# EAGLE board SKAARDUINO-POE_v1.0_panel (EAGLE 7.5.0), part 1 of 5
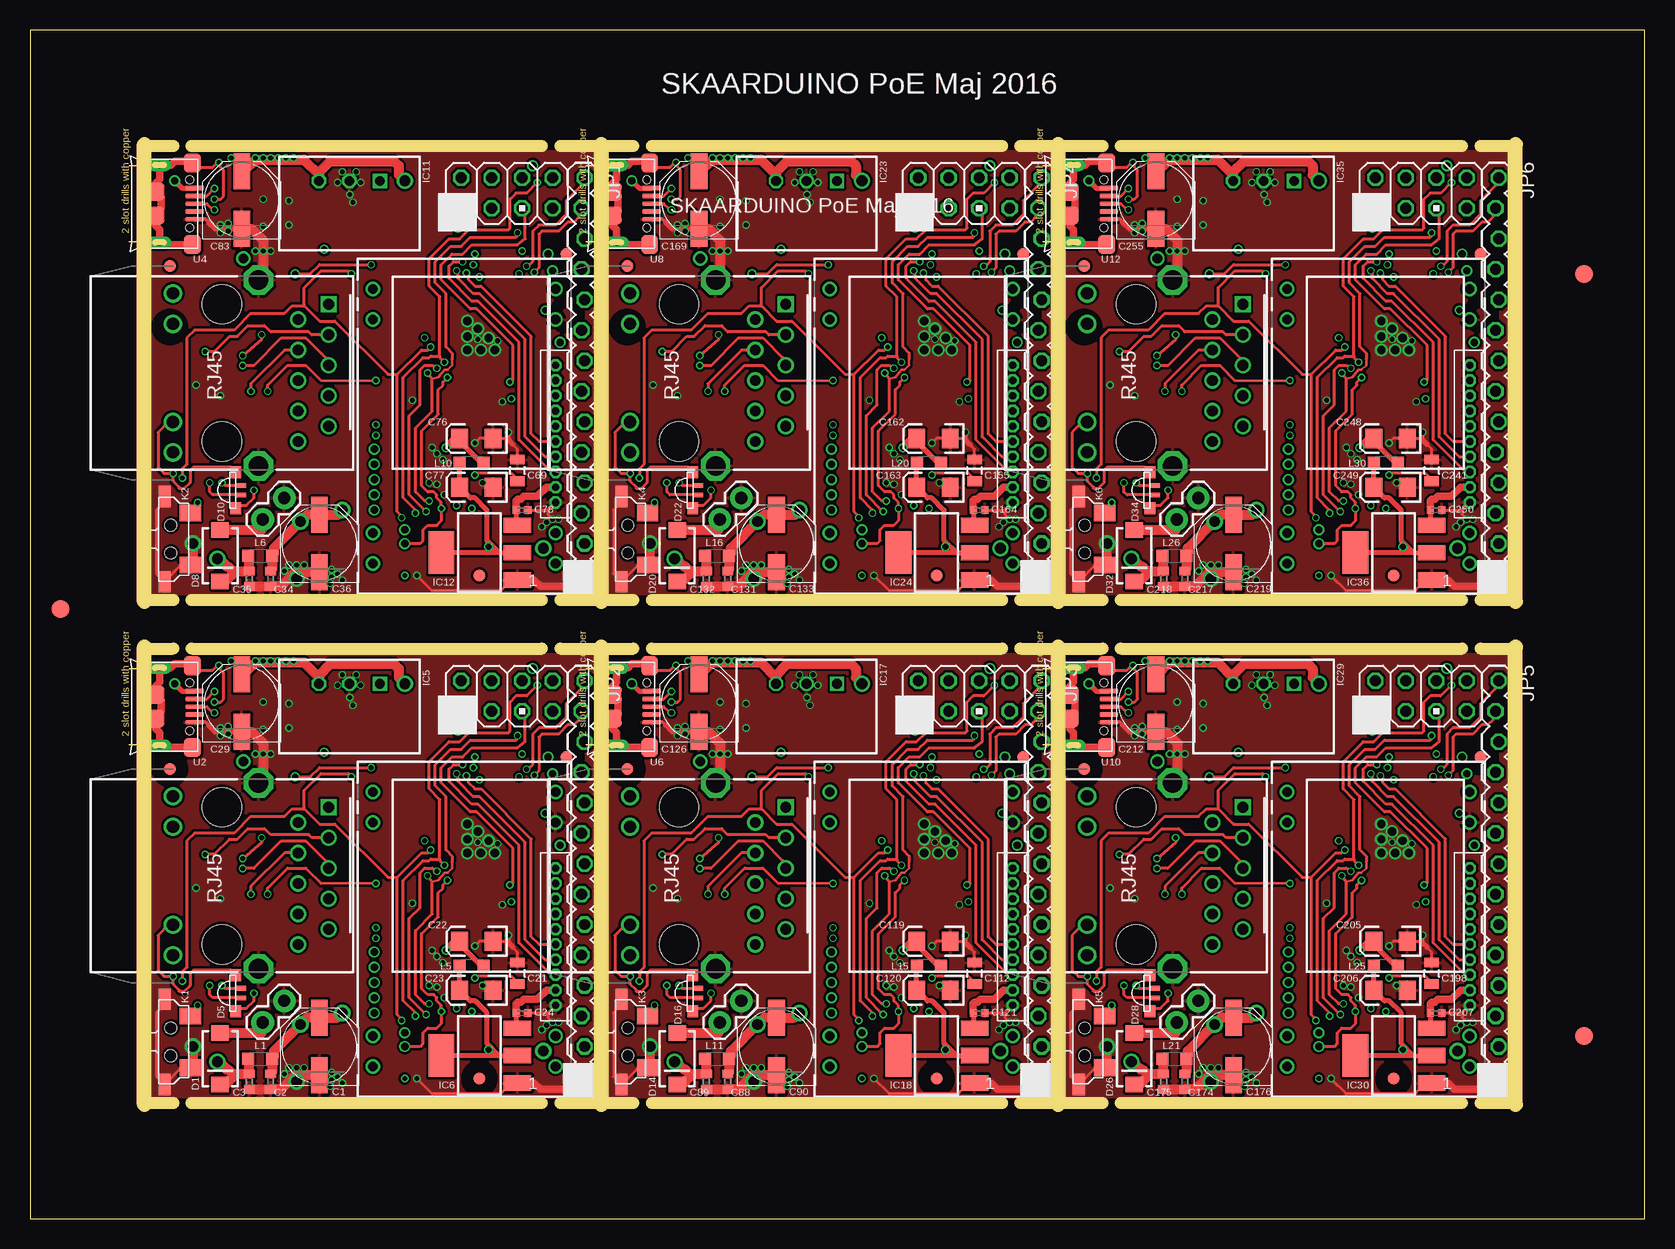
[diagram p0: board, top side]
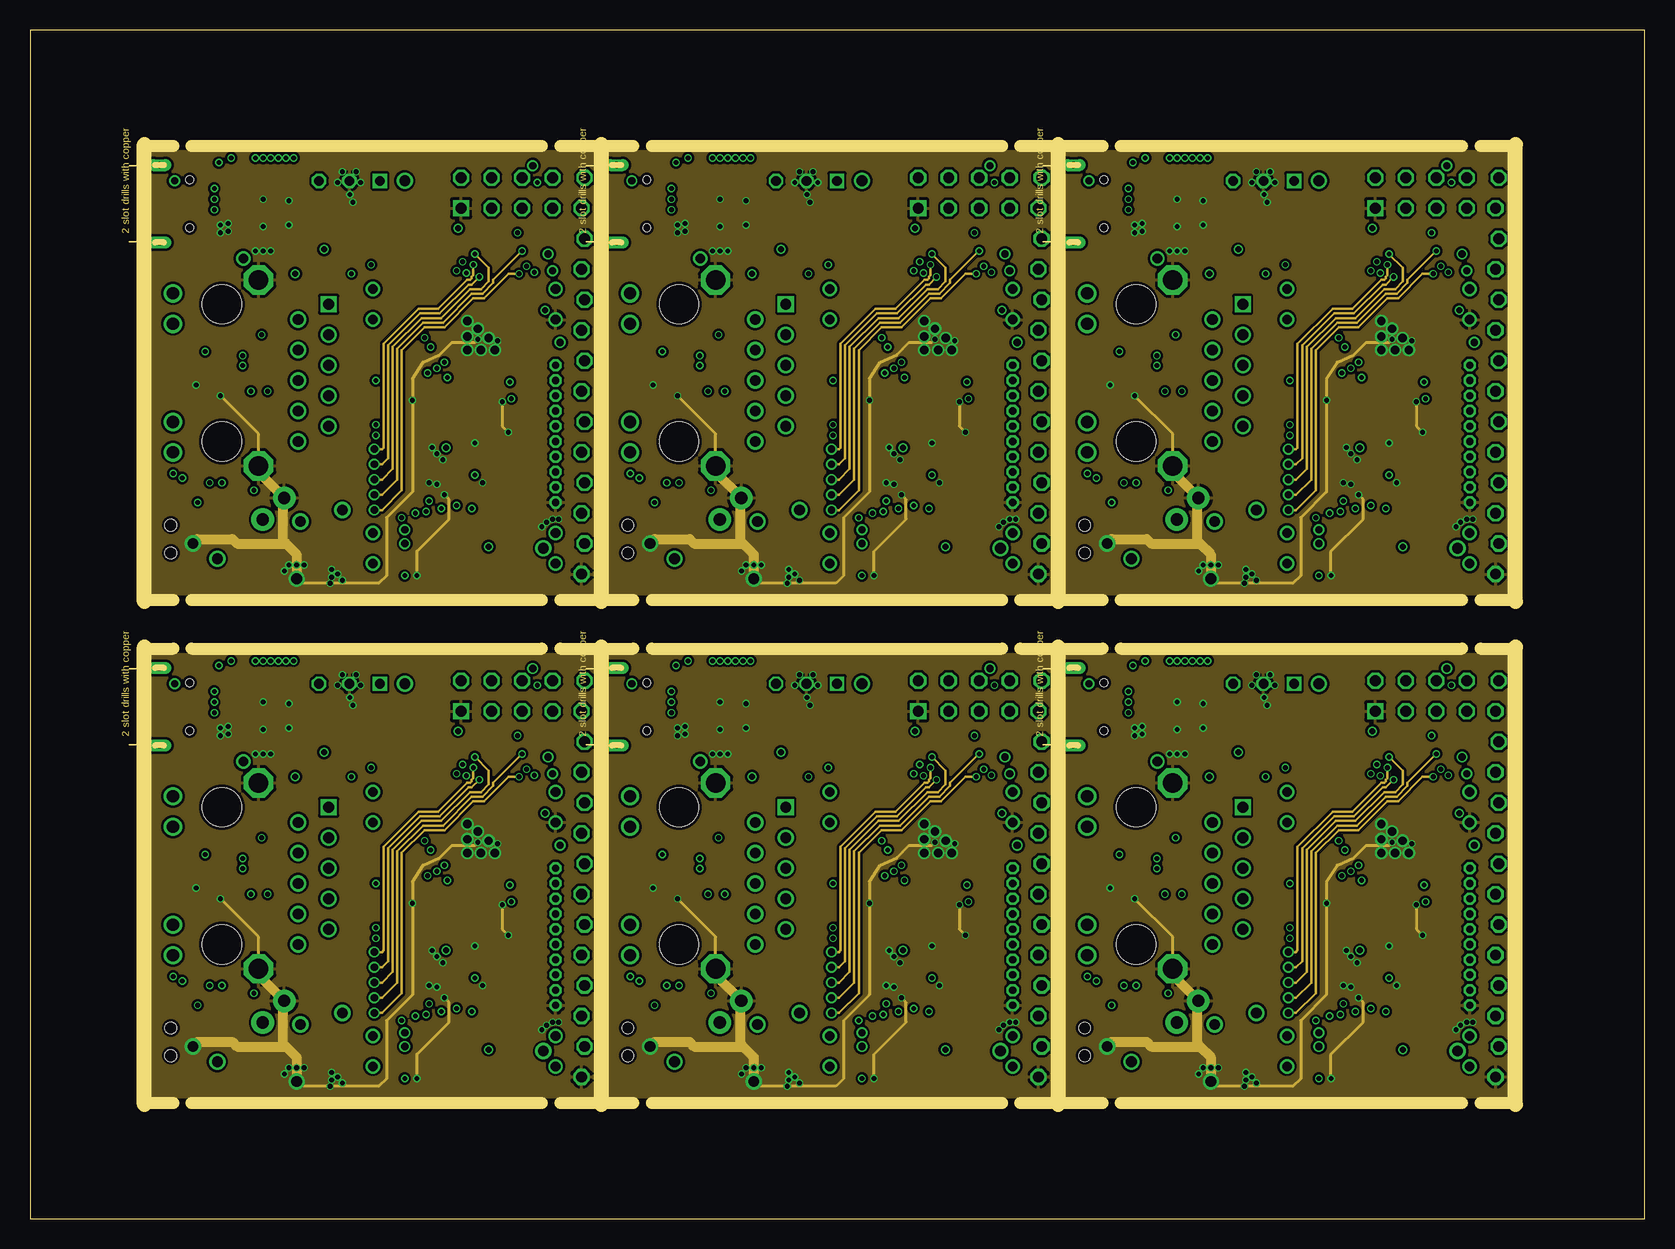
[diagram p1: board, inner layer GND]
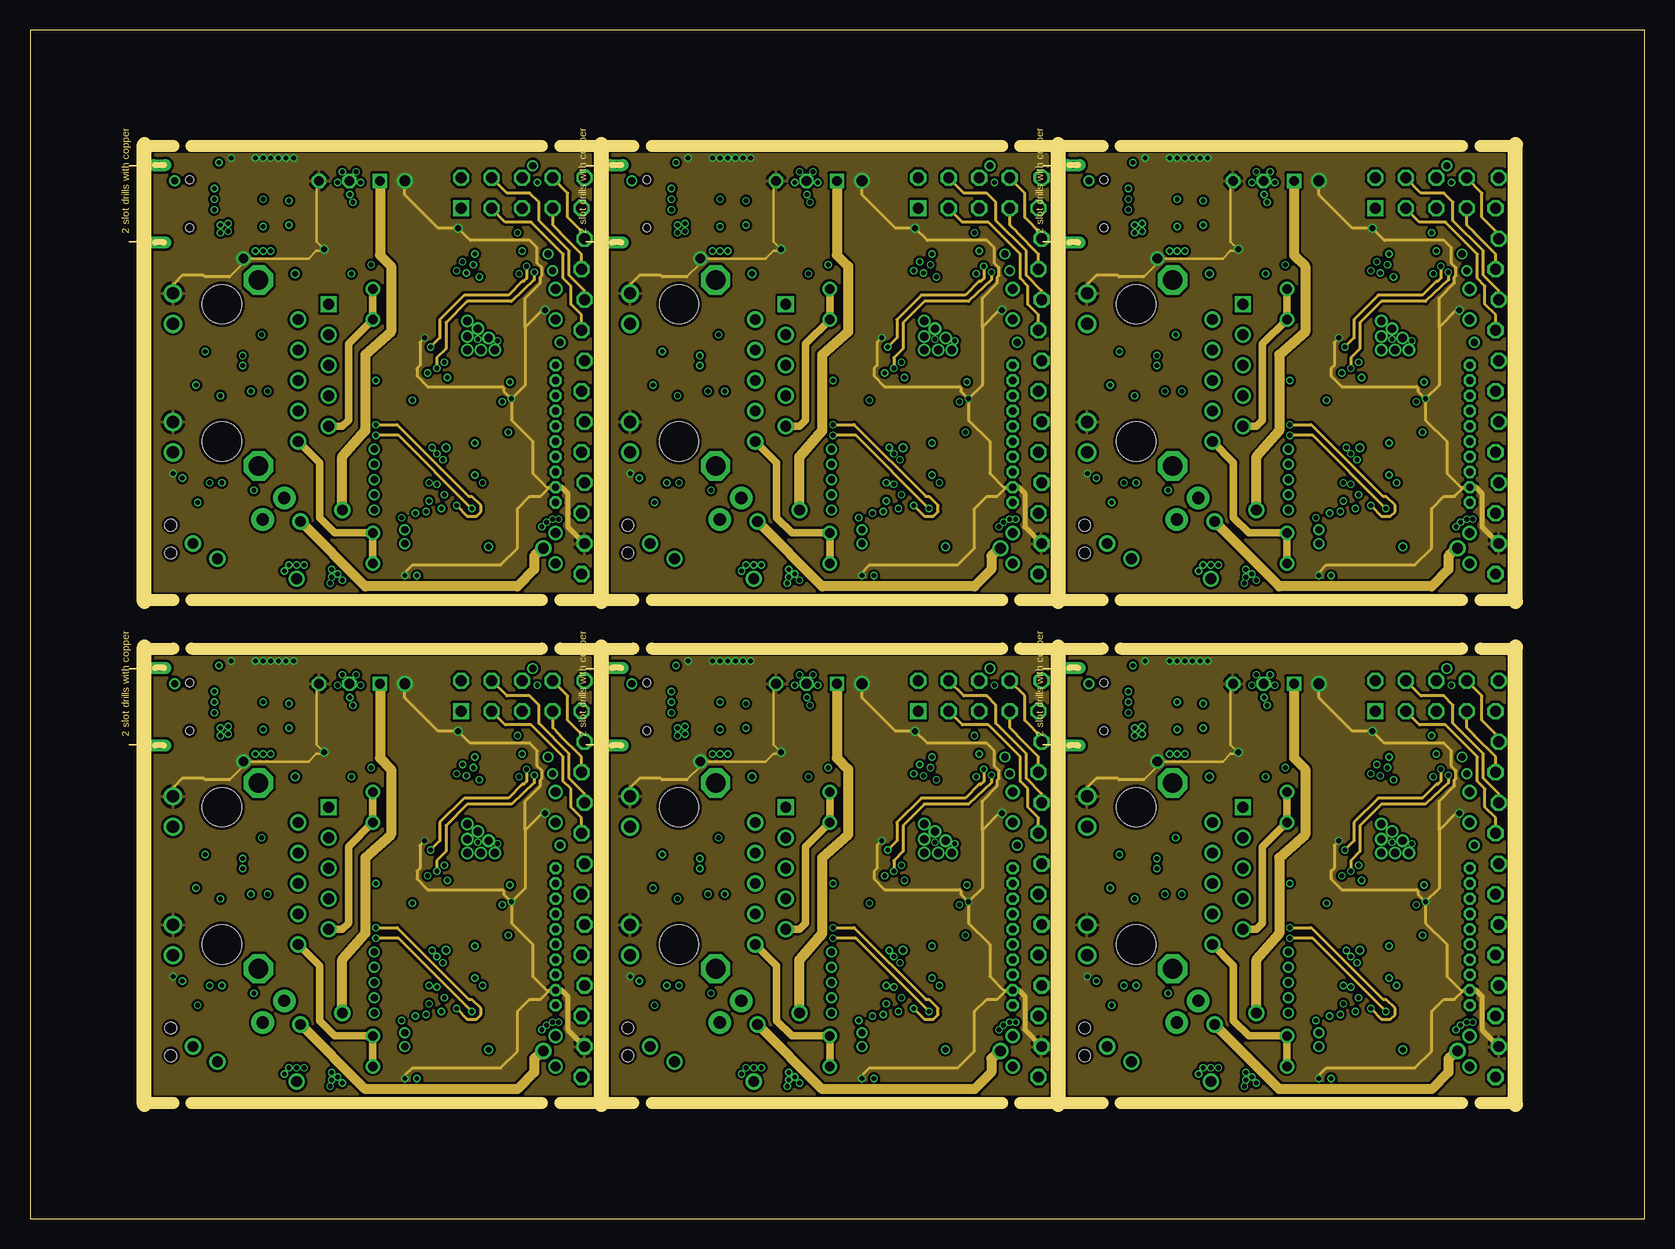
[diagram p2: board, inner layer 5V]
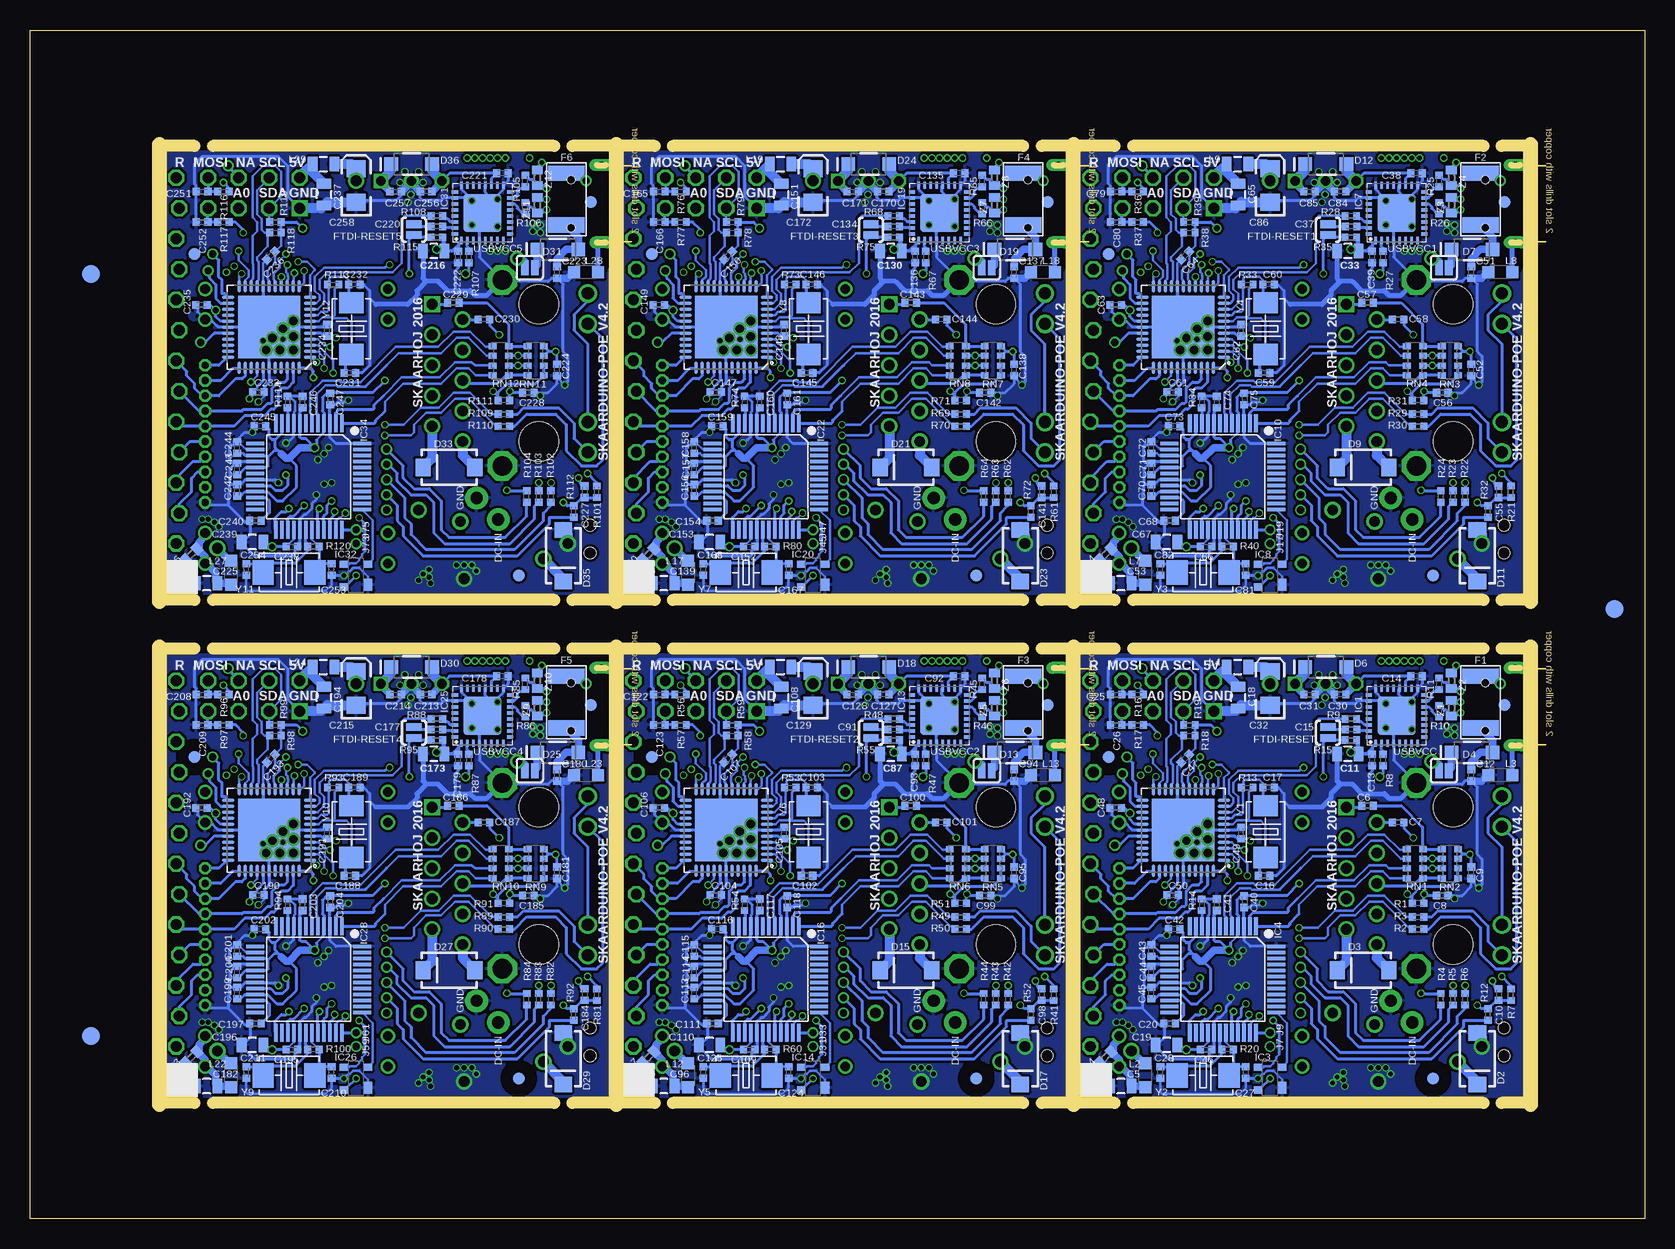
[diagram p3: board, bottom side, seen from below]

Size 134.62 x 99.06 mm. Coordinates in mm from the lower left corner, seen from the top.
Outline: 0,0 134.62,0 134.62,99.06 0,99.06 0,0
Copper layers (1*2*15*16): Top 0.035mm / dielectric 0.2mm / GND 0.0175mm / dielectric 0.3mm / 5V 0.0175mm / dielectric 0.2mm / Bottom 0.035mm
Design rules "SeeedStudio_4layer_DRU_no_angle_20140221 *": minimum track width 8mil, minimum drill 12mil, track to track 8mil, track to pad 8mil, pad to pad 8mil, via to via 8mil, smd to smd 0mil, copper to edge 10mil, drill to drill 8mil, minimum pad ring 6mil, minimum via ring 4mil, stop-mask expansion 4mil, vias tented up to drill 100mil, thermal gap 10mil
Net classes: 0 default: width 0.203 mm, clearance 0.127 mm; 1 power: width 0.203 mm, clearance 0.127 mm; 2 VIN: width 0.406 mm, clearance 0.61 mm
tKeepout: area 29.8,10.2 to 33.1,47
tRestrict: area 10.7,36.4 to 12.7,38.5; area 43.7,37.5 to 45.7,39.5; area 36.4,10.7 to 38.5,12.7; area 10.7,73.3 to 12.7,75.3; area 43.7,74.3 to 45.7,76.3; area 36.4,47.5 to 38.5,49.5; area 48.8,36.4 to 50.8,38.5; area 81.8,37.5 to 83.8,39.5; area 74.5,10.7 to 76.6,12.7; area 48.8,73.3 to 50.8,75.3; area 81.8,74.3 to 83.8,76.3; area 74.5,47.5 to 76.6,49.5; 6 more areas
bRestrict: area 16.6,10.7 to 18.7,12.7; area 10.7,41.8 to 12.7,43.8; area 43.7,37.5 to 45.7,39.5; area 16.6,47.5 to 18.7,49.5; area 10.7,78.6 to 12.7,80.6; area 43.7,74.3 to 45.7,76.3; area 54.7,10.7 to 56.8,12.7; area 48.8,41.8 to 50.8,43.8; area 81.8,37.5 to 83.8,39.5; area 54.7,47.5 to 56.8,49.5; area 48.8,78.6 to 50.8,80.6; area 81.8,74.3 to 83.8,76.3; 6 more areas
Milling: 36 lines

## Footprints (pad centres in the part's own frame; a part is rotated, then mirrored left to right if it is on the bottom)
PANASONIC_D = smd 3 x 1.4: + 2.4,0; - -2.4,0
C0402 = smd 0.7 x 0.9: 1 -0.65,0; 2 0.65,0
0805 = smd 0.8 x 1.2: 1 -0.9,0; 2 0.9,0
0402C = smd 0.59 x 0.64: 1 -0.48,0; 2 0.48,0
EIA3216 = smd 1.4 x 1.6: A 1.4,0; C -1.4,0
SMA-DIODE = smd 1.27 x 1.47: A -2.15,0; C 2.15,0
SOD-123 = smd 1.143 x 1.143: 1 0,0; 2 3.429,0
LED-TRICOLOR-SMD = smd 1 x 0.9: A -1.5,0; R 1.5,0 | smd 0.4 x 0.8: B 0.4,0.45; G -0.4,0.45
FIDUCIAL-1.5X3 = smd 1.5 x 1.5: 1 0,0
FIDUCIAL-1.5X3_BOTTOM = smd 1.5 x 1.5 bottom: 1 0,0
F1812 = smd 1.27 x 3.048: 1 -2.159,0; 2 2.159,0
FIDUCIAL-1X2.5 = smd 1 x 1: 1 0,0
SJ_2S-NO = smd 0.635 x 1.27: 1 -0.45,0; 2 0.45,0
QFN32 = smd 0.6 x 0.3: 1 -2.3,1.75; 2 -2.3,1.25; 3 -2.3,0.75; 4 -2.3,0.25; 5 -2.3,-0.25; 6 -2.3,-0.75; 7 -2.3,-1.25; 8 -2.3,-1.75; 17 2.3,-1.75; 18 2.3,-1.25; 19 2.3,-0.75; 20 2.3,-0.25; 21 2.3,0.25; 22 2.3,0.75; 23 2.3,1.25; 24 2.3,1.75 | smd 0.3 x 0.6: 9 -1.75,-2.3; 10 -1.25,-2.3; 11 -0.75,-2.3; 12 -0.25,-2.3; 13 0.25,-2.3; 14 0.75,-2.3; 15 1.25,-2.3; 16 1.75,-2.3; 25 1.75,2.3; 26 1.25,2.3; 27 0.75,2.3; 28 0.25,2.3; 29 -0.25,2.3; 30 -0.75,2.3; 31 -1.25,2.3; 32 -1.75,2.3 | smd 3.2 x 3.2: EXP 0,0
QFN-44M1 = smd 0.3 x 1.05: 1 -2.5,-3.4; 2 -2,-3.4; 3 -1.5,-3.4; 4 -1,-3.4; 5 -0.5,-3.4; 6 0,-3.4; 7 0.5,-3.4; 8 1,-3.4; 9 1.5,-3.4; 10 2,-3.4; 11 2.5,-3.4; 23 2.5,3.4; 24 2,3.4; 25 1.5,3.4; 26 1,3.4; 27 0.5,3.4; 28 0,3.4; 29 -0.5,3.4; 30 -1,3.4; 31 -1.5,3.4; 32 -2,3.4; 33 -2.5,3.4 | smd 1.05 x 0.3: 12 3.4,-2.5; 13 3.4,-2; 14 3.4,-1.5; 15 3.4,-1; 16 3.4,-0.5; 17 3.4,0; 18 3.4,0.5; 19 3.4,1; 20 3.4,1.5; 21 3.4,2; 22 3.4,2.5; 34 -3.4,2.5; 35 -3.4,2; 36 -3.4,1.5; 37 -3.4,1; 38 -3.4,0.5; 39 -3.4,0; 40 -3.4,-0.5; 41 -3.4,-1; 42 -3.4,-1.5; 43 -3.4,-2; 44 -3.4,-2.5 | smd 5.2 x 5.2: TGND 0,0
SOT143-R = smd 1 x 0.7: 1 -0.75,-1 | smd 0.6 x 0.7: 2 0.95,-1; 3 0.95,1; 4 -0.95,1
LQFP-48 = smd 1.5 x 0.3: 1 -4.45,2.75; 2 -4.45,2.25; 3 -4.45,1.75; 4 -4.45,1.25; 5 -4.45,0.75; 6 -4.45,0.25; 7 -4.45,-0.25; 8 -4.45,-0.75; 9 -4.45,-1.25; 10 -4.45,-1.75; 11 -4.45,-2.25; 12 -4.45,-2.75; 25 4.45,-2.75; 26 4.45,-2.25; 27 4.45,-1.75; 28 4.45,-1.25; 29 4.45,-0.75; 30 4.45,-0.25; 31 4.45,0.25; 32 4.45,0.75; 33 4.45,1.25; 34 4.45,1.75; 35 4.45,2.25; 36 4.45,2.75 | smd 0.3 x 1.5: 13 -2.75,-4.45; 14 -2.25,-4.45; 15 -1.75,-4.45; 16 -1.25,-4.45; 17 -0.75,-4.45; 18 -0.25,-4.45; 19 0.25,-4.45; 20 0.75,-4.45; 21 1.25,-4.45; 22 1.75,-4.45; 23 2.25,-4.45; 24 2.75,-4.45; 37 2.75,4.45; 38 2.25,4.45; 39 1.75,4.45; 40 1.25,4.45; 41 0.75,4.45; 42 0.25,4.45; 43 -0.25,4.45; 44 -0.75,4.45; 45 -1.25,4.45; 46 -1.75,4.45; 47 -2.25,4.45; 48 -2.75,4.45
RECOM_785.0-1.0 = drill 0.8 square: P$1 -2.54,0 | drill 0.8 octagon: P$2 0,0; P$3 2.54,0
SOT-223 = smd 1.27 x 2.286: 1 -2.286,-3.175; 2 0,-3.175; 3 2.286,-3.175 | smd 3.556 x 2.159: TER 0,3.175
M1X1 = drill 0.6 pad 0.813: 1 0,0
1X02 = drill 1.016 pad 1.88: 1 0,0; 2 2.54,0
M2X4SMALLER = drill 0.9 square: 1 -1.27,3.81 | drill 0.9 octagon: 2 1.27,3.81; 3 -1.27,1.27; 4 1.27,1.27; 5 -1.27,-1.27; 6 1.27,-1.27; 7 -1.27,-3.81; 8 1.27,-3.81
M10X1 = drill 0.6 pad 1.016 octagon: 1 0,0; 2 0,1.27; 3 0,2.54; 4 0,3.81; 5 0,5.08; 6 0,6.35; 7 0,7.62; 8 0,8.89; 9 0,10.16; 10 0,11.43
1X14_LOCK = drill 0.9 octagon: 1 0,0.127; 2 2.54,-0.127; 3 5.08,0.127; 4 7.62,-0.127; 5 10.16,0.127; 6 12.7,-0.127; 7 15.24,0.127; 8 17.78,-0.127; 9 20.32,0.127; 10 22.86,-0.127; 11 25.4,0.127; 12 27.94,-0.127; 13 30.48,0.127; 14 33.02,-0.127
SW4-SMD-7.0X3.5X3.5MM-90D = smd 1.397 x 1.778: 1 -2.159,1.651; 2 2.159,1.651 | smd 1.778 x 1.016: S1 -3.556,-0.508; S2 3.556,-0.508 | hole 0.95: -1.15,0; 1.15,0
L2012C = smd 1 x 1: 1 -1,0; 2 1,0
0402 = smd 0.571 x 0.62: 1 -0.48,0; 2 0.48,0
CAY16 = smd 0.5 x 0.65: 1 -1.2,-0.675; 2 -0.4,-0.675; 3 0.4,-0.675; 4 1.2,-0.675; 5 1.2,0.675; 6 0.4,0.675; 7 -0.4,0.675; 8 -1.2,0.675
HY931147C = drill 1.63 octagon: GND1 3.05,7.745; GND2 3.05,-7.745 | drill 0.9 square: P$1 8.89,5.715 | drill 0.9: P$2 6.35,4.445; P$3 8.89,3.175; P$4 6.35,1.905; P$5 8.89,0.635; P$6 6.35,-0.635; P$7 8.89,-1.905; P$8 6.35,-3.175; P$9 8.89,-4.445; P$10 6.35,-5.715 | drill 1.016: P$11 -4.08,6.625; P$12 -4.08,4.085; P$13 -4.08,-4.085; P$14 -4.08,-6.625 | hole 3.25: 0,5.715; 0,-5.715
MICRO-USB5+4P-SMD-0.65-B = smd 0.381 x 1.524: 1 -1.3,-0.25; 2 -0.65,-0.25; 3 0,-0.25; 4 0.65,-0.25; 5 1.3,-0.25 | smd 1.6 x 1.397: S1 -3.4,-0.427; S6 3.4,-0.427 | drill 0.508 pad 1.016 long: S2 -3.226,-3.175; S5 3.226,-3.175 | smd 1.5 x 1.5: S3 -1,-3.5; S4 1,-3.5 | hole 0.635: -2,-0.65; 2,-0.65
AG9800PTH = drill 0.8: P1 -7.62,11.43; P2 -7.62,8.89; P3 -7.62,-8.89; P4 -7.62,-11.43; P5 7.62,-11.43; P6 7.62,-8.89; P7 7.62,8.89; P8 7.62,11.43
SJ_2S = smd 0.635 x 1.27: 1 -0.412,0; 2 0.412,0
X2-SMD-5.0X3.2X1.3MM = smd 1.778 x 2.032: 1 -2.159,0; 2 2.159,0

## Placement (x,y rotation side)
C1  100uF/25V  [PANASONIC_D]  24.13,14.35 90 top
C2  100nF/25V  [C0402]  20.07,11.43 270 top
C3  100nF/25V  [C0402]  18.29,11.43 270 top
C4  100nF/25V  [C0402]  44.96,13.46 225 bottom
C5  10uF/25V  [0805]  43.69,11.05 180 bottom
C6  6.8nF  [0402C]  23.11,34.42 180 bottom
C7  6.8nF  [0402C]  20.57,33.02 180 bottom
C8  22nF  [0402C]  16.89,26.92 180 bottom
C9  10nF  [0402C]  14.48,28.83 90 bottom
C10  1uF  [0402C]  12.19,18.67 270 bottom
C11  22uF  [0805]  24.77,38.73 180 bottom
C12  1uF  [0402C]  14.48,36.96 90 bottom
C13  100nF  [0402C]  22.73,38.23 90 bottom
C14  100nF  [0402C]  19.05,45.21 180 bottom
C15  100nF  [0402C]  24.51,40.77 180 bottom
C16  22pF  [0402C]  31.75,28.57 180 bottom
C17  22pF  [0402C]  31.37,35.94 180 bottom
C18  22uF/6.3V  [0805]  33.91,43.43 90 bottom
C19  10uF/16V  [0805]  39.88,14.48 180 bottom
C20  10nF  [0402C]  39.62,16.26 180 bottom
C21  4.7uF  [0805]  40.64,20.45 90 top
C22  10uF 6.3V A TANT  [EIA3216]  37.21,23.11 180 top
C23  10uF 6.3V A TANT  [EIA3216]  37.21,19.05 180 top
C24  100nF  [0402C]  41.02,17.14 0 top
C25  22pF  [0402C]  44.07,43.69 0 bottom
C26  22pF  [0402C]  44.07,41.15 0 bottom
C27  18pF  [0402C]  33.27,12.19 90 bottom
C28  18pF  [0402C]  40.39,12.19 90 bottom
C29  330uF/6.3V  [PANASONIC_D]  17.66,42.97 90 top
C30  100nF  [0402C]  25.4,43.69 180 bottom
C31  100nF/25V  [0402C]  27.94,43.69 0 bottom
C32  10uF 6.3V A TANT  [EIA3216]  31.24,44.2 90 bottom
C33  22uF  [0805]  24.77,80.64 180 bottom
C34  100nF/25V  [C0402]  20.07,53.34 270 top
C35  100nF/25V  [C0402]  18.29,53.34 270 top
C36  100uF/25V  [PANASONIC_D]  24.13,56.26 90 top
C37  100nF  [0402C]  24.51,82.68 180 bottom
C38  100nF  [0402C]  19.05,87.12 180 bottom
C39  100nF  [0402C]  22.73,80.14 90 bottom
C40  100nF  [0402C]  33.4,26.42 270 bottom
C41  100nF  [0402C]  35.69,26.16 90 bottom
C42  100nF  [0402C]  39.24,24.13 180 bottom
C43  100nF  [0402C]  41.15,22.35 90 bottom
C44  100nF  [0402C]  41.15,20.57 90 bottom
C45  100nF  [0402C]  41.15,18.8 90 bottom
C46  100nF  [0402C]  36.58,14.1 0 bottom
C47  100nF  [0402C]  38.33,38.35 225 bottom
C48  100nF  [0402C]  44.12,34.24 180 bottom
C49  100nF  [0402C]  33.66,32.13 90 bottom
C50  100nF  [0402C]  39.37,26.97 0 bottom
C51  1uF  [0402C]  14.48,78.87 90 bottom
C52  10nF  [0402C]  14.48,70.74 90 bottom
C53  10uF/25V  [0805]  43.69,52.96 180 bottom
C54  100nF/25V  [C0402]  44.96,55.37 225 bottom
C55  1uF  [0402C]  12.19,60.58 270 bottom
C56  22nF  [0402C]  16.89,68.83 180 bottom
C57  6.8nF  [0402C]  23.11,76.33 180 bottom
C58  6.8nF  [0402C]  20.57,74.93 180 bottom
C59  22pF  [0402C]  31.75,70.48 180 bottom
C60  22pF  [0402C]  31.37,77.85 180 bottom
C61  100nF  [0402C]  39.37,68.88 0 bottom
C62  100nF  [0402C]  33.66,74.04 90 bottom
C63  100nF  [0402C]  44.12,76.15 180 bottom
C64  100nF  [0402C]  38.33,80.26 225 bottom
C65  22uF/6.3V  [0805]  33.91,85.34 90 bottom
C66  100nF  [0402C]  36.58,56.01 0 bottom
C67  10uF/16V  [0805]  39.88,56.39 180 bottom
C68  10nF  [0402C]  39.62,58.17 180 bottom
C69  4.7uF  [0805]  40.64,62.36 90 top
C70  100nF  [0402C]  41.15,60.71 90 bottom
C71  100nF  [0402C]  41.15,62.48 90 bottom
C72  100nF  [0402C]  41.15,64.26 90 bottom
C73  100nF  [0402C]  39.24,66.04 180 bottom
C74  100nF  [0402C]  35.69,68.07 90 bottom
C75  100nF  [0402C]  33.4,68.33 270 bottom
C76  10uF 6.3V A TANT  [EIA3216]  37.21,65.02 180 top
C77  10uF 6.3V A TANT  [EIA3216]  37.21,60.96 180 top
C78  100nF  [0402C]  41.02,59.05 0 top
C79  22pF  [0402C]  44.07,85.6 0 bottom
C80  22pF  [0402C]  44.07,83.06 0 bottom
C81  18pF  [0402C]  33.27,54.1 90 bottom
C82  18pF  [0402C]  40.39,54.1 90 bottom
C83  330uF/6.3V  [PANASONIC_D]  17.66,84.88 90 top
C84  100nF  [0402C]  25.4,85.6 180 bottom
C85  100nF/25V  [0402C]  27.94,85.6 0 bottom
C86  10uF 6.3V A TANT  [EIA3216]  31.24,86.11 90 bottom
C87  22uF  [0805]  62.87,38.73 180 bottom
C88  100nF/25V  [C0402]  58.17,11.43 270 top
C89  100nF/25V  [C0402]  56.39,11.43 270 top
C90  100uF/25V  [PANASONIC_D]  62.23,14.35 90 top
C91  100nF  [0402C]  62.61,40.77 180 bottom
C92  100nF  [0402C]  57.15,45.21 180 bottom
C93  100nF  [0402C]  60.83,38.23 90 bottom
C94  1uF  [0402C]  52.58,36.96 90 bottom
C95  10nF  [0402C]  52.58,28.83 90 bottom
C96  10uF/25V  [0805]  81.79,11.05 180 bottom
C97  100nF/25V  [C0402]  83.06,13.46 225 bottom
C98  1uF  [0402C]  50.29,18.67 270 bottom
C99  22nF  [0402C]  54.99,26.92 180 bottom
C100  6.8nF  [0402C]  61.21,34.42 180 bottom
C101  6.8nF  [0402C]  58.67,33.02 180 bottom
C102  22pF  [0402C]  69.85,28.57 180 bottom
C103  22pF  [0402C]  69.47,35.94 180 bottom
C104  100nF  [0402C]  77.47,26.97 0 bottom
C105  100nF  [0402C]  71.75,32.13 90 bottom
C106  100nF  [0402C]  82.22,34.24 180 bottom
C107  100nF  [0402C]  76.43,38.35 225 bottom
C108  22uF/6.3V  [0805]  72.01,43.43 90 bottom
C109  100nF  [0402C]  74.68,14.1 0 bottom
C110  10uF/16V  [0805]  77.98,14.48 180 bottom
C111  10nF  [0402C]  77.72,16.26 180 bottom
C112  4.7uF  [0805]  78.74,20.45 90 top
C113  100nF  [0402C]  79.25,18.8 90 bottom
C114  100nF  [0402C]  79.25,20.57 90 bottom
C115  100nF  [0402C]  79.25,22.35 90 bottom
C116  100nF  [0402C]  77.34,24.13 180 bottom
C117  100nF  [0402C]  73.79,26.16 90 bottom
C118  100nF  [0402C]  71.5,26.42 270 bottom
C119  10uF 6.3V A TANT  [EIA3216]  75.31,23.11 180 top
C120  10uF 6.3V A TANT  [EIA3216]  75.31,19.05 180 top
C121  100nF  [0402C]  79.12,17.14 0 top
C122  22pF  [0402C]  82.17,43.69 0 bottom
C123  22pF  [0402C]  82.17,41.15 0 bottom
C124  18pF  [0402C]  71.37,12.19 90 bottom
C125  18pF  [0402C]  78.49,12.19 90 bottom
C126  330uF/6.3V  [PANASONIC_D]  55.76,42.97 90 top
C127  100nF  [0402C]  63.5,43.69 180 bottom
C128  100nF/25V  [0402C]  66.04,43.69 0 bottom
C129  10uF 6.3V A TANT  [EIA3216]  69.34,44.2 90 bottom
C130  22uF  [0805]  62.87,80.64 180 bottom
C131  100nF/25V  [C0402]  58.17,53.34 270 top
C132  100nF/25V  [C0402]  56.39,53.34 270 top
C133  100uF/25V  [PANASONIC_D]  62.23,56.26 90 top
C134  100nF  [0402C]  62.61,82.68 180 bottom
C135  100nF  [0402C]  57.15,87.12 180 bottom
C136  100nF  [0402C]  60.83,80.14 90 bottom
C137  1uF  [0402C]  52.58,78.87 90 bottom
C138  10nF  [0402C]  52.58,70.74 90 bottom
C139  10uF/25V  [0805]  81.79,52.96 180 bottom
C140  100nF/25V  [C0402]  83.06,55.37 225 bottom
C141  1uF  [0402C]  50.29,60.58 270 bottom
C142  22nF  [0402C]  54.99,68.83 180 bottom
C143  6.8nF  [0402C]  61.21,76.33 180 bottom
C144  6.8nF  [0402C]  58.67,74.93 180 bottom
C145  22pF  [0402C]  69.85,70.48 180 bottom
C146  22pF  [0402C]  69.47,77.85 180 bottom
C147  100nF  [0402C]  77.47,68.88 0 bottom
C148  100nF  [0402C]  71.75,74.04 90 bottom
C149  100nF  [0402C]  82.22,76.15 180 bottom
C150  100nF  [0402C]  76.43,80.26 225 bottom
C151  22uF/6.3V  [0805]  72.01,85.34 90 bottom
C152  100nF  [0402C]  74.68,56.01 0 bottom
C153  10uF/16V  [0805]  77.98,56.39 180 bottom
C154  10nF  [0402C]  77.72,58.17 180 bottom
C155  4.7uF  [0805]  78.74,62.36 90 top
C156  100nF  [0402C]  79.25,60.71 90 bottom
C157  100nF  [0402C]  79.25,62.48 90 bottom
C158  100nF  [0402C]  79.25,64.26 90 bottom
C159  100nF  [0402C]  77.34,66.04 180 bottom
C160  100nF  [0402C]  73.79,68.07 90 bottom
C161  100nF  [0402C]  71.5,68.33 270 bottom
C162  10uF 6.3V A TANT  [EIA3216]  75.31,65.02 180 top
C163  10uF 6.3V A TANT  [EIA3216]  75.31,60.96 180 top
C164  100nF  [0402C]  79.12,59.05 0 top
C165  22pF  [0402C]  82.17,85.6 0 bottom
C166  22pF  [0402C]  82.17,83.06 0 bottom
C167  18pF  [0402C]  71.37,54.1 90 bottom
C168  18pF  [0402C]  78.49,54.1 90 bottom
C169  330uF/6.3V  [PANASONIC_D]  55.76,84.88 90 top
C170  100nF  [0402C]  63.5,85.6 180 bottom
C171  100nF/25V  [0402C]  66.04,85.6 0 bottom
C172  10uF 6.3V A TANT  [EIA3216]  69.34,86.11 90 bottom
C173  22uF  [0805]  100.97,38.73 180 bottom
C174  100nF/25V  [C0402]  96.27,11.43 270 top
C175  100nF/25V  [C0402]  94.49,11.43 270 top
C176  100uF/25V  [PANASONIC_D]  100.33,14.35 90 top
C177  100nF  [0402C]  100.71,40.77 180 bottom
C178  100nF  [0402C]  95.25,45.21 180 bottom
C179  100nF  [0402C]  98.93,38.23 90 bottom
C180  1uF  [0402C]  90.68,36.96 90 bottom
C181  10nF  [0402C]  90.68,28.83 90 bottom
C182  10uF/25V  [0805]  119.89,11.05 180 bottom
C183  100nF/25V  [C0402]  121.16,13.46 225 bottom
C184  1uF  [0402C]  88.39,18.67 270 bottom
C185  22nF  [0402C]  93.09,26.92 180 bottom
C186  6.8nF  [0402C]  99.31,34.42 180 bottom
C187  6.8nF  [0402C]  96.77,33.02 180 bottom
C188  22pF  [0402C]  107.95,28.57 180 bottom
C189  22pF  [0402C]  107.57,35.94 180 bottom
C190  100nF  [0402C]  115.57,26.97 0 bottom
C191  100nF  [0402C]  109.86,32.13 90 bottom
C192  100nF  [0402C]  120.32,34.24 180 bottom
C193  100nF  [0402C]  114.53,38.35 225 bottom
C194  22uF/6.3V  [0805]  110.11,43.43 90 bottom
C195  100nF  [0402C]  112.78,14.1 0 bottom
C196  10uF/16V  [0805]  116.08,14.48 180 bottom
C197  10nF  [0402C]  115.82,16.26 180 bottom
C198  4.7uF  [0805]  116.84,20.45 90 top
C199  100nF  [0402C]  117.35,18.8 90 bottom
C200  100nF  [0402C]  117.35,20.57 90 bottom
C201  100nF  [0402C]  117.35,22.35 90 bottom
C202  100nF  [0402C]  115.44,24.13 180 bottom
C203  100nF  [0402C]  111.89,26.16 90 bottom
C204  100nF  [0402C]  109.6,26.42 270 bottom
C205  10uF 6.3V A TANT  [EIA3216]  113.41,23.11 180 top
C206  10uF 6.3V A TANT  [EIA3216]  113.41,19.05 180 top
C207  100nF  [0402C]  117.22,17.14 0 top
C208  22pF  [0402C]  120.27,43.69 0 bottom
C209  22pF  [0402C]  120.27,41.15 0 bottom
C210  18pF  [0402C]  109.47,12.19 90 bottom
C211  18pF  [0402C]  116.59,12.19 90 bottom
C212  330uF/6.3V  [PANASONIC_D]  93.86,42.97 90 top
C213  100nF  [0402C]  101.6,43.69 180 bottom
C214  100nF/25V  [0402C]  104.14,43.69 0 bottom
C215  10uF 6.3V A TANT  [EIA3216]  107.44,44.2 90 bottom
C216  22uF  [0805]  100.97,80.64 180 bottom
C217  100nF/25V  [C0402]  96.27,53.34 270 top
C218  100nF/25V  [C0402]  94.49,53.34 270 top
C219  100uF/25V  [PANASONIC_D]  100.33,56.26 90 top
C220  100nF  [0402C]  100.71,82.68 180 bottom
C221  100nF  [0402C]  95.25,87.12 180 bottom
C222  100nF  [0402C]  98.93,80.14 90 bottom
C223  1uF  [0402C]  90.68,78.87 90 bottom
C224  10nF  [0402C]  90.68,70.74 90 bottom
C225  10uF/25V  [0805]  119.89,52.96 180 bottom
C226  100nF/25V  [C0402]  121.16,55.37 225 bottom
C227  1uF  [0402C]  88.39,60.58 270 bottom
C228  22nF  [0402C]  93.09,68.83 180 bottom
C229  6.8nF  [0402C]  99.31,76.33 180 bottom
C230  6.8nF  [0402C]  96.77,74.93 180 bottom
C231  22pF  [0402C]  107.95,70.48 180 bottom
C232  22pF  [0402C]  107.57,77.85 180 bottom
C233  100nF  [0402C]  115.57,68.88 0 bottom
C234  100nF  [0402C]  109.86,74.04 90 bottom
C235  100nF  [0402C]  120.32,76.15 180 bottom
C236  100nF  [0402C]  114.53,80.26 225 bottom
C237  22uF/6.3V  [0805]  110.11,85.34 90 bottom
C238  100nF  [0402C]  112.78,56.01 0 bottom
C239  10uF/16V  [0805]  116.08,56.39 180 bottom
C240  10nF  [0402C]  115.82,58.17 180 bottom
C241  4.7uF  [0805]  116.84,62.36 90 top
C242  100nF  [0402C]  117.35,60.71 90 bottom
C243  100nF  [0402C]  117.35,62.48 90 bottom
C244  100nF  [0402C]  117.35,64.26 90 bottom
C245  100nF  [0402C]  115.44,66.04 180 bottom
C246  100nF  [0402C]  111.89,68.07 90 bottom
C247  100nF  [0402C]  109.6,68.33 270 bottom
C248  10uF 6.3V A TANT  [EIA3216]  113.41,65.02 180 top
C249  10uF 6.3V A TANT  [EIA3216]  113.41,60.96 180 top
C250  100nF  [0402C]  117.22,59.05 0 top
C251  22pF  [0402C]  120.27,85.6 0 bottom
C252  22pF  [0402C]  120.27,83.06 0 bottom
C253  18pF  [0402C]  109.47,54.1 90 bottom
C254  18pF  [0402C]  116.59,54.1 90 bottom
C255  330uF/6.3V  [PANASONIC_D]  93.86,84.88 90 top
C256  100nF  [0402C]  101.6,85.6 180 bottom
C257  100nF/25V  [0402C]  104.14,85.6 0 bottom
C258  10uF 6.3V A TANT  [EIA3216]  107.44,86.11 90 bottom
D1  MBRA210LT3G  [SMA-DIODE]  15.84,13.34 270 top
D2  SMAJ58CA  [SMA-DIODE]  13.97,13.34 270 bottom
D3  SMAJ58CA  [SMA-DIODE]  23.5,20.7 180 bottom
D4  MBR0520  [SOD-123]  16.13,38.86 0 bottom
D5  KPFA-3010RGBC-11  [LED-TRICOLOR-SMD]  17.16,18.8 270 top
D6  MBR0520  [SOD-123]  28.32,45.97 0 bottom
D7  MBR0520  [SOD-123]  16.13,80.77 0 bottom
D8  MBRA210LT3G  [SMA-DIODE]  15.84,55.24 270 top
D9  SMAJ58CA  [SMA-DIODE]  23.5,62.61 180 bottom
D10  KPFA-3010RGBC-11  [LED-TRICOLOR-SMD]  17.16,60.71 270 top
D11  SMAJ58CA  [SMA-DIODE]  13.97,55.24 270 bottom
D12  MBR0520  [SOD-123]  28.32,87.88 0 bottom
D13  MBR0520  [SOD-123]  54.23,38.86 0 bottom
D14  MBRA210LT3G  [SMA-DIODE]  53.94,13.34 270 top
D15  SMAJ58CA  [SMA-DIODE]  61.59,20.7 180 bottom
D16  KPFA-3010RGBC-11  [LED-TRICOLOR-SMD]  55.26,18.8 270 top
D17  SMAJ58CA  [SMA-DIODE]  52.07,13.34 270 bottom
D18  MBR0520  [SOD-123]  66.42,45.97 0 bottom
D19  MBR0520  [SOD-123]  54.23,80.77 0 bottom
D20  MBRA210LT3G  [SMA-DIODE]  53.94,55.24 270 top
D21  SMAJ58CA  [SMA-DIODE]  61.59,62.61 180 bottom
D22  KPFA-3010RGBC-11  [LED-TRICOLOR-SMD]  55.26,60.71 270 top
D23  SMAJ58CA  [SMA-DIODE]  52.07,55.24 270 bottom
D24  MBR0520  [SOD-123]  66.42,87.88 0 bottom
D25  MBR0520  [SOD-123]  92.33,38.86 0 bottom
D26  MBRA210LT3G  [SMA-DIODE]  92.04,13.34 270 top
D27  SMAJ58CA  [SMA-DIODE]  99.69,20.7 180 bottom
D28  KPFA-3010RGBC-11  [LED-TRICOLOR-SMD]  93.36,18.8 270 top
D29  SMAJ58CA  [SMA-DIODE]  90.17,13.34 270 bottom
D30  MBR0520  [SOD-123]  104.52,45.97 0 bottom
D31  MBR0520  [SOD-123]  92.33,80.77 0 bottom
D32  MBRA210LT3G  [SMA-DIODE]  92.04,55.24 270 top
D33  SMAJ58CA  [SMA-DIODE]  99.69,62.61 180 bottom
D34  KPFA-3010RGBC-11  [LED-TRICOLOR-SMD]  93.36,60.71 270 top
D35  SMAJ58CA  [SMA-DIODE]  90.17,55.24 270 bottom
D36  MBR0520  [SOD-123]  104.52,87.88 0 bottom
E$1  [FIDUCIAL-1.5X3]  2.54,50.8 0 top
E$2  [FIDUCIAL-1.5X3]  129.54,78.74 0 top
E$3  [FIDUCIAL-1.5X3]  129.54,15.24 0 top
E$4  [FIDUCIAL-1.5X3_BOTTOM]  2.54,50.8 0 top
E$5  [FIDUCIAL-1.5X3_BOTTOM]  129.54,78.74 0 top
E$6  [FIDUCIAL-1.5X3_BOTTOM]  129.54,15.24 0 top
F1  SMD-PPTC-500MA-15V(1812)  [F1812]  13.72,43.05 270 bottom
F2  SMD-PPTC-500MA-15V(1812)  [F1812]  13.72,84.96 270 bottom
F3  SMD-PPTC-500MA-15V(1812)  [F1812]  51.82,43.05 270 bottom
F4  SMD-PPTC-500MA-15V(1812)  [F1812]  51.82,84.96 270 bottom
F5  SMD-PPTC-500MA-15V(1812)  [F1812]  89.92,43.05 270 bottom
F6  SMD-PPTC-500MA-15V(1812)  [F1812]  89.92,84.96 270 bottom
FID1  FIDUCIAL1X2.5  [FIDUCIAL-1X2.5]  11.68,37.47 0 top
FID2  FIDUCIAL1X2.5  [FIDUCIAL-1X2.5]  11.68,42.8 0 bottom
FID3  FIDUCIAL1X2.5  [FIDUCIAL-1X2.5]  44.7,38.48 0 top
FID4  FIDUCIAL1X2.5  [FIDUCIAL-1X2.5]  17.65,11.68 0 bottom
FID5  FIDUCIAL1X2.5  [FIDUCIAL-1X2.5]  37.47,11.68 0 top
FID6  FIDUCIAL1X2.5  [FIDUCIAL-1X2.5]  11.68,79.38 0 top
FID7  FIDUCIAL1X2.5  [FIDUCIAL-1X2.5]  44.7,80.39 0 top
FID8  FIDUCIAL1X2.5  [FIDUCIAL-1X2.5]  44.7,38.48 0 bottom
FID9  FIDUCIAL1X2.5  [FIDUCIAL-1X2.5]  17.65,53.59 0 bottom
FID10  FIDUCIAL1X2.5  [FIDUCIAL-1X2.5]  11.68,84.71 0 bottom
FID11  FIDUCIAL1X2.5  [FIDUCIAL-1X2.5]  37.47,53.59 0 top
FID12  FIDUCIAL1X2.5  [FIDUCIAL-1X2.5]  44.7,80.39 0 bottom
FID13  FIDUCIAL1X2.5  [FIDUCIAL-1X2.5]  49.78,37.47 0 top
FID14  FIDUCIAL1X2.5  [FIDUCIAL-1X2.5]  82.8,38.48 0 top
FID15  FIDUCIAL1X2.5  [FIDUCIAL-1X2.5]  55.75,11.68 0 bottom
FID16  FIDUCIAL1X2.5  [FIDUCIAL-1X2.5]  49.78,42.8 0 bottom
FID17  FIDUCIAL1X2.5  [FIDUCIAL-1X2.5]  75.56,11.68 0 top
FID18  FIDUCIAL1X2.5  [FIDUCIAL-1X2.5]  82.8,38.48 0 bottom
FID19  FIDUCIAL1X2.5  [FIDUCIAL-1X2.5]  49.78,79.38 0 top
FID20  FIDUCIAL1X2.5  [FIDUCIAL-1X2.5]  82.8,80.39 0 top
FID21  FIDUCIAL1X2.5  [FIDUCIAL-1X2.5]  55.75,53.59 0 bottom
FID22  FIDUCIAL1X2.5  [FIDUCIAL-1X2.5]  49.78,84.71 0 bottom
FID23  FIDUCIAL1X2.5  [FIDUCIAL-1X2.5]  75.56,53.59 0 top
FID24  FIDUCIAL1X2.5  [FIDUCIAL-1X2.5]  82.8,80.39 0 bottom
FID25  FIDUCIAL1X2.5  [FIDUCIAL-1X2.5]  87.88,37.47 0 top
FID26  FIDUCIAL1X2.5  [FIDUCIAL-1X2.5]  120.9,38.48 0 top
FID27  FIDUCIAL1X2.5  [FIDUCIAL-1X2.5]  93.85,11.68 0 bottom
FID28  FIDUCIAL1X2.5  [FIDUCIAL-1X2.5]  87.88,42.8 0 bottom
FID29  FIDUCIAL1X2.5  [FIDUCIAL-1X2.5]  113.67,11.68 0 top
FID30  FIDUCIAL1X2.5  [FIDUCIAL-1X2.5]  120.9,38.48 0 bottom
FID31  FIDUCIAL1X2.5  [FIDUCIAL-1X2.5]  87.88,79.38 0 top
FID32  FIDUCIAL1X2.5  [FIDUCIAL-1X2.5]  120.9,80.39 0 top
FID33  FIDUCIAL1X2.5  [FIDUCIAL-1X2.5]  93.85,53.59 0 bottom
FID34  FIDUCIAL1X2.5  [FIDUCIAL-1X2.5]  87.88,84.71 0 bottom
FID35  FIDUCIAL1X2.5  [FIDUCIAL-1X2.5]  113.67,53.59 0 top
FID36  FIDUCIAL1X2.5  [FIDUCIAL-1X2.5]  120.9,80.39 0 bottom
FTDI-RESET  SOLDERJUMPERNO  [SJ_2S-NO]  26.42,40.51 270 bottom
FTDI-RESET1  SOLDERJUMPERNO  [SJ_2S-NO]  26.42,82.42 270 bottom
FTDI-RESET2  SOLDERJUMPERNO  [SJ_2S-NO]  64.52,40.51 270 bottom
FTDI-RESET3  SOLDERJUMPERNO  [SJ_2S-NO]  64.52,82.42 270 bottom
FTDI-RESET4  SOLDERJUMPERNO  [SJ_2S-NO]  102.62,40.51 270 bottom
FTDI-RESET5  SOLDERJUMPERNO  [SJ_2S-NO]  102.62,82.42 270 bottom
IC1  FT232RQ  [QFN32]  20.7,41.91 90 bottom
IC2  ATMEGA1284P  [QFN-44M1]  38.48,32.38 90 bottom
IC3  APX811-44UG-7  [SOT143-R]  31.24,11.68 90 bottom
IC4  WizNet W5500  [LQFP-48]  35.18,19.94 270 bottom
IC5  RECOM 785.0-1.0  [RECOM_785.0-1.0]  26.63,44.58 180 top
IC6  LD1117S33CTR  [SOT-223]  37.47,13.6 90 top
IC7  FT232RQ  [QFN32]  20.7,83.82 90 bottom
IC8  APX811-44UG-7  [SOT143-R]  31.24,53.59 90 bottom
IC9  ATMEGA1284P  [QFN-44M1]  38.48,74.3 90 bottom
IC10  WizNet W5500  [LQFP-48]  35.18,61.85 270 bottom
IC11  RECOM 785.0-1.0  [RECOM_785.0-1.0]  26.63,86.49 180 top
IC12  LD1117S33CTR  [SOT-223]  37.47,55.51 90 top
IC13  FT232RQ  [QFN32]  58.8,41.91 90 bottom
IC14  APX811-44UG-7  [SOT143-R]  69.34,11.68 90 bottom
IC15  ATMEGA1284P  [QFN-44M1]  76.58,32.38 90 bottom
IC16  WizNet W5500  [LQFP-48]  73.28,19.94 270 bottom
IC17  RECOM 785.0-1.0  [RECOM_785.0-1.0]  64.73,44.58 180 top
IC18  LD1117S33CTR  [SOT-223]  75.56,13.6 90 top
IC19  FT232RQ  [QFN32]  58.8,83.82 90 bottom
IC20  APX811-44UG-7  [SOT143-R]  69.34,53.59 90 bottom
IC21  ATMEGA1284P  [QFN-44M1]  76.58,74.3 90 bottom
IC22  WizNet W5500  [LQFP-48]  73.28,61.85 270 bottom
IC23  RECOM 785.0-1.0  [RECOM_785.0-1.0]  64.73,86.49 180 top
IC24  LD1117S33CTR  [SOT-223]  75.56,55.51 90 top
IC25  FT232RQ  [QFN32]  96.9,41.91 90 bottom
IC26  APX811-44UG-7  [SOT143-R]  107.44,11.68 90 bottom
IC27  ATMEGA1284P  [QFN-44M1]  114.68,32.38 90 bottom
IC28  WizNet W5500  [LQFP-48]  111.38,19.94 270 bottom
IC29  RECOM 785.0-1.0  [RECOM_785.0-1.0]  102.83,44.58 180 top
IC30  LD1117S33CTR  [SOT-223]  113.67,13.6 90 top
IC31  FT232RQ  [QFN32]  96.9,83.82 90 bottom
IC32  APX811-44UG-7  [SOT143-R]  107.44,53.59 90 bottom
IC33  ATMEGA1284P  [QFN-44M1]  114.68,74.3 90 bottom
IC34  WizNet W5500  [LQFP-48]  111.38,61.85 270 bottom
IC35  RECOM 785.0-1.0  [RECOM_785.0-1.0]  102.83,86.49 180 top
IC36  LD1117S33CTR  [SOT-223]  113.67,55.51 90 top
J1  SS  [M1X1]  28.7,20.95 0 top
J2  DC IN JACK  [1X02]  19.4,16.36 45 top
J3  SS  [M1X1]  28.7,19.68 0 top
J4  SS  [M1X1]  28.7,18.41 0 top
J5  M04X2M2X4SMALLER  [M2X4SMALLER]  39.75,43.56 90 top
J6  SS  [M1X1]  28.7,17.14 0 top
J7  SS  [M1X1]  31.24,14.35 0 bottom
J8  M10_1.27  [M10X1]  43.81,17.78 0 top
J9  W_INT  [M1X1]  31.24,15.49 0 top
J10  D11  [M1X1]  43.18,38.48 0 top
J11  D12  [M1X1]  43.56,37.08 0 top
J12  AREF  [M1X1]  44.2,31.11 0 top
J13  SS  [M1X1]  28.7,22.23 0 top
J14  SS  [M1X1]  41.91,45.85 0 top
J15  DC IN JACK  [1X02]  19.4,58.27 45 top
J16  M04X2M2X4SMALLER  [M2X4SMALLER]  39.75,85.47 90 top
J17  SS  [M1X1]  31.24,56.26 0 bottom
J18  M10_1.27  [M10X1]  43.81,59.69 0 top
J19  W_INT  [M1X1]  31.24,57.4 0 top
J20  D11  [M1X1]  43.18,80.39 0 top
J21  D12  [M1X1]  43.56,78.99 0 top
J22  AREF  [M1X1]  44.2,73.03 0 top
J23  SS  [M1X1]  28.7,62.87 0 top
J24  SS  [M1X1]  28.7,61.59 0 top
J25  SS  [M1X1]  28.7,60.33 0 top
J26  SS  [M1X1]  28.7,59.05 0 top
J27  SS  [M1X1]  28.7,64.14 0 top
J28  SS  [M1X1]  41.91,87.76 0 top
J29  DC IN JACK  [1X02]  57.5,16.36 45 top
J30  M04X2M2X4SMALLER  [M2X4SMALLER]  77.85,43.56 90 top
J31  SS  [M1X1]  69.34,14.35 0 bottom
J32  M10_1.27  [M10X1]  81.92,17.78 0 top
J33  W_INT  [M1X1]  69.34,15.49 0 top
J34  D11  [M1X1]  81.28,38.48 0 top
J35  D12  [M1X1]  81.66,37.08 0 top
J36  AREF  [M1X1]  82.3,31.11 0 top
J37  SS  [M1X1]  66.8,20.95 0 top
J38  SS  [M1X1]  66.8,19.68 0 top
J39  SS  [M1X1]  66.8,18.41 0 top
J40  SS  [M1X1]  66.8,17.14 0 top
J41  SS  [M1X1]  66.8,22.23 0 top
J42  SS  [M1X1]  80.01,45.85 0 top
J43  DC IN JACK  [1X02]  57.5,58.27 45 top
J44  M04X2M2X4SMALLER  [M2X4SMALLER]  77.85,85.47 90 top
J45  SS  [M1X1]  69.34,56.26 0 bottom
J46  M10_1.27  [M10X1]  81.92,59.69 0 top
J47  W_INT  [M1X1]  69.34,57.4 0 top
J48  D11  [M1X1]  81.28,80.39 0 top
J49  D12  [M1X1]  81.66,78.99 0 top
J50  AREF  [M1X1]  82.3,73.03 0 top
J51  SS  [M1X1]  66.8,62.87 0 top
J52  SS  [M1X1]  66.8,61.59 0 top
J53  SS  [M1X1]  66.8,60.33 0 top
J54  SS  [M1X1]  66.8,59.05 0 top
J55  SS  [M1X1]  66.8,64.14 0 top
J56  SS  [M1X1]  80.01,87.76 0 top
J57  DC IN JACK  [1X02]  95.6,16.36 45 top
J58  M04X2M2X4SMALLER  [M2X4SMALLER]  115.95,43.56 90 top
J59  SS  [M1X1]  107.44,14.35 0 bottom
J60  M10_1.27  [M10X1]  120.02,17.78 0 top
J61  W_INT  [M1X1]  107.44,15.49 0 top
J62  D11  [M1X1]  119.38,38.48 0 top
J63  D12  [M1X1]  119.76,37.08 0 top
J64  AREF  [M1X1]  120.4,31.11 0 top
J65  SS  [M1X1]  104.9,20.95 0 top
J66  SS  [M1X1]  104.9,19.68 0 top
J67  SS  [M1X1]  104.9,18.41 0 top
J68  SS  [M1X1]  104.9,17.14 0 top
J69  SS  [M1X1]  104.9,22.23 0 top
J70  SS  [M1X1]  118.11,45.85 0 top
J71  DC IN JACK  [1X02]  95.6,58.27 45 top
J72  M04X2M2X4SMALLER  [M2X4SMALLER]  115.95,85.47 90 top
J73  SS  [M1X1]  107.44,56.26 0 bottom
J74  M10_1.27  [M10X1]  120.02,59.69 0 top
J75  W_INT  [M1X1]  107.44,57.4 0 top
J76  D11  [M1X1]  119.38,80.39 0 top
J77  D12  [M1X1]  119.76,78.99 0 top
J78  AREF  [M1X1]  120.4,73.03 0 top
J79  SS  [M1X1]  104.9,62.87 0 top
J80  SS  [M1X1]  104.9,61.59 0 top
J81  SS  [M1X1]  104.9,60.33 0 top
J82  SS  [M1X1]  104.9,59.05 0 top
J83  SS  [M1X1]  104.9,64.14 0 top
J84  SS  [M1X1]  118.11,87.76 0 top
JP1  M14LOCK  [1X14_LOCK]  46.1,86.74 270 top
JP2  M14LOCK  [1X14_LOCK]  46.1,44.83 270 top
JP3  M14LOCK  [1X14_LOCK]  84.2,44.83 270 top
JP4  M14LOCK  [1X14_LOCK]  84.2,86.74 270 top
JP5  M14LOCK  [1X14_LOCK]  122.3,44.83 270 top
JP6  M14LOCK  [1X14_LOCK]  122.3,86.74 270 top
K1  RESET/CFG  [SW4-SMD-7.0X3.5X3.5MM-90D]  11.73,14.73 270 top
K2  RESET/CFG  [SW4-SMD-7.0X3.5X3.5MM-90D]  11.73,56.64 270 top
K3  RESET/CFG  [SW4-SMD-7.0X3.5X3.5MM-90D]  49.83,14.73 270 top
K4  RESET/CFG  [SW4-SMD-7.0X3.5X3.5MM-90D]  49.83,56.64 270 top
K5  RESET/CFG  [SW4-SMD-7.0X3.5X3.5MM-90D]  87.93,14.73 270 top
K6  RESET/CFG  [SW4-SMD-7.0X3.5X3.5MM-90D]  87.93,56.64 270 top
L1  Bead ILHB0805ER121V  [L2012C]  19.18,13.34 0 top
L2  Bead ILHB0805ER121V  [L2012C]  41.66,11.94 90 bottom
L3  Bead ILHB0805ER121V  [L2012C]  12.06,36.96 180 bottom
L4  Bead ILHB0805ER121V  [0805]  33.96,45.97 0 bottom
L5  1uH 250mA 0805  [L2012C]  36.83,21.08 0 top
L6  Bead ILHB0805ER121V  [L2012C]  19.18,55.24 0 top
L7  Bead ILHB0805ER121V  [L2012C]  41.66,53.85 90 bottom
L8  Bead ILHB0805ER121V  [L2012C]  12.06,78.87 180 bottom
L9  Bead ILHB0805ER121V  [0805]  33.96,87.88 0 bottom
L10  1uH 250mA 0805  [L2012C]  36.83,62.99 0 top
L11  Bead ILHB0805ER121V  [L2012C]  57.28,13.34 0 top
L12  Bead ILHB0805ER121V  [L2012C]  79.76,11.94 90 bottom
L13  Bead ILHB0805ER121V  [L2012C]  50.16,36.96 180 bottom
L14  Bead ILHB0805ER121V  [0805]  72.06,45.97 0 bottom
L15  1uH 250mA 0805  [L2012C]  74.93,21.08 0 top
L16  Bead ILHB0805ER121V  [L2012C]  57.28,55.24 0 top
L17  Bead ILHB0805ER121V  [L2012C]  79.76,53.85 90 bottom
L18  Bead ILHB0805ER121V  [L2012C]  50.16,78.87 180 bottom
L19  Bead ILHB0805ER121V  [0805]  72.06,87.88 0 bottom
L20  1uH 250mA 0805  [L2012C]  74.93,62.99 0 top
L21  Bead ILHB0805ER121V  [L2012C]  95.38,13.34 0 top
L22  Bead ILHB0805ER121V  [L2012C]  117.86,11.94 90 bottom
L23  Bead ILHB0805ER121V  [L2012C]  88.27,36.96 180 bottom
L24  Bead ILHB0805ER121V  [0805]  110.16,45.97 0 bottom
L25  1uH 250mA 0805  [L2012C]  113.03,21.08 0 top
L26  Bead ILHB0805ER121V  [L2012C]  95.38,55.24 0 top
L27  Bead ILHB0805ER121V  [L2012C]  117.86,53.85 90 bottom
L28  Bead ILHB0805ER121V  [L2012C]  88.27,78.87 180 bottom
L29  Bead ILHB0805ER121V  [0805]  110.16,87.88 0 bottom
L30  1uH 250mA 0805  [L2012C]  113.03,62.99 0 top
R1  10R/1%  [0402]  18.92,26.29 180 bottom
R2  470R  [0402]  18.92,24.13 0 bottom
R3  470R  [0402]  18.92,25.15 0 bottom
R4  390R  [0402]  17.02,18.29 90 bottom
R5  540R  [0402]  16,18.29 90 bottom
R6  2K7  [0402]  14.99,18.29 90 bottom
R7  10K  [0402]  11.18,18.67 90 bottom
R8  1K  [0402]  21.84,38.23 270 bottom
R9  1K  [0402]  24.51,41.66 180 bottom
R10  22R  [0402]  17.14,42.29 90 bottom
R11  22R  [0402]  17.14,44.58 90 bottom
R12  100K  [0402]  13.08,17.02 90 bottom
R13  1M  [0402]  33.15,35.94 0 bottom
R14  12K4 / 1%  [0402]  36.96,26.16 270 bottom
R15  10K  [0402]  24.51,39.88 0 bottom
R16  100R  [0402]  42.29,43.69 0 bottom
R17  100R  [0402]  42.29,41.15 0 bottom
R18  1K5  [0402]  37.97,40.26 0 bottom
R19  1K5  [0402]  37.97,41.15 0 bottom
R20  1M  [0402]  34.8,14.1 180 bottom
R21  10K  [0402]  11.18,60.58 90 bottom
R22  2K7  [0402]  14.99,60.2 90 bottom
R23  540R  [0402]  16,60.2 90 bottom
R24  390R  [0402]  17.02,60.2 90 bottom
R25  22R  [0402]  17.14,86.49 90 bottom
R26  22R  [0402]  17.14,84.2 90 bottom
R27  1K  [0402]  21.84,80.14 270 bottom
R28  1K  [0402]  24.51,83.57 180 bottom
R29  470R  [0402]  18.92,67.06 0 bottom
R30  470R  [0402]  18.92,66.04 0 bottom
R31  10R/1%  [0402]  18.92,68.2 180 bottom
R32  100K  [0402]  13.08,58.93 90 bottom
R33  1M  [0402]  33.15,77.85 0 bottom
R34  12K4 / 1%  [0402]  36.96,68.07 270 bottom
R35  10K  [0402]  24.51,81.79 0 bottom
R36  100R  [0402]  42.29,85.6 0 bottom
R37  100R  [0402]  42.29,83.06 0 bottom
R38  1K5  [0402]  37.97,82.17 0 bottom
R39  1K5  [0402]  37.97,83.06 0 bottom
R40  1M  [0402]  34.8,56.01 180 bottom
R41  10K  [0402]  49.28,18.67 90 bottom
R42  2K7  [0402]  53.09,18.29 90 bottom
R43  540R  [0402]  54.1,18.29 90 bottom
R44  390R  [0402]  55.12,18.29 90 bottom
R45  22R  [0402]  55.24,44.58 90 bottom
R46  22R  [0402]  55.24,42.29 90 bottom
R47  1K  [0402]  59.94,38.23 270 bottom
R48  1K  [0402]  62.61,41.66 180 bottom
R49  470R  [0402]  57.02,25.15 0 bottom
R50  470R  [0402]  57.02,24.13 0 bottom
R51  10R/1%  [0402]  57.02,26.29 180 bottom
R52  100K  [0402]  51.18,17.02 90 bottom
R53  1M  [0402]  71.25,35.94 0 bottom
R54  12K4 / 1%  [0402]  75.06,26.16 270 bottom
R55  10K  [0402]  62.61,39.88 0 bottom
R56  100R  [0402]  80.39,43.69 0 bottom
R57  100R  [0402]  80.39,41.15 0 bottom
R58  1K5  [0402]  76.07,40.26 0 bottom
R59  1K5  [0402]  76.07,41.15 0 bottom
R60  1M  [0402]  72.9,14.1 180 bottom
R61  10K  [0402]  49.28,60.58 90 bottom
R62  2K7  [0402]  53.09,60.2 90 bottom
R63  540R  [0402]  54.1,60.2 90 bottom
R64  390R  [0402]  55.12,60.2 90 bottom
R65  22R  [0402]  55.24,86.49 90 bottom
R66  22R  [0402]  55.24,84.2 90 bottom
R67  1K  [0402]  59.94,80.14 270 bottom
R68  1K  [0402]  62.61,83.57 180 bottom
R69  470R  [0402]  57.02,67.06 0 bottom
R70  470R  [0402]  57.02,66.04 0 bottom
R71  10R/1%  [0402]  57.02,68.2 180 bottom
R72  100K  [0402]  51.18,58.93 90 bottom
R73  1M  [0402]  71.25,77.85 0 bottom
R74  12K4 / 1%  [0402]  75.06,68.07 270 bottom
R75  10K  [0402]  62.61,81.79 0 bottom
R76  100R  [0402]  80.39,85.6 0 bottom
R77  100R  [0402]  80.39,83.06 0 bottom
R78  1K5  [0402]  76.07,82.17 0 bottom
R79  1K5  [0402]  76.07,83.06 0 bottom
R80  1M  [0402]  72.9,56.01 180 bottom
R81  10K  [0402]  87.38,18.67 90 bottom
R82  2K7  [0402]  91.19,18.29 90 bottom
R83  540R  [0402]  92.2,18.29 90 bottom
R84  390R  [0402]  93.22,18.29 90 bottom
R85  22R  [0402]  93.34,44.58 90 bottom
R86  22R  [0402]  93.34,42.29 90 bottom
R87  1K  [0402]  98.04,38.23 270 bottom
R88  1K  [0402]  100.71,41.66 180 bottom
R89  470R  [0402]  95.12,25.15 0 bottom
R90  470R  [0402]  95.12,24.13 0 bottom
R91  10R/1%  [0402]  95.12,26.29 180 bottom
R92  100K  [0402]  89.28,17.02 90 bottom
R93  1M  [0402]  109.35,35.94 0 bottom
R94  12K4 / 1%  [0402]  113.16,26.16 270 bottom
R95  10K  [0402]  100.71,39.88 0 bottom
R96  100R  [0402]  118.49,43.69 0 bottom
R97  100R  [0402]  118.49,41.15 0 bottom
R98  1K5  [0402]  114.17,40.26 0 bottom
R99  1K5  [0402]  114.17,41.15 0 bottom
R100  1M  [0402]  111,14.1 180 bottom
R101  10K  [0402]  87.38,60.58 90 bottom
R102  2K7  [0402]  91.19,60.2 90 bottom
R103  540R  [0402]  92.2,60.2 90 bottom
R104  390R  [0402]  93.22,60.2 90 bottom
R105  22R  [0402]  93.34,86.49 90 bottom
R106  22R  [0402]  93.34,84.2 90 bottom
R107  1K  [0402]  98.04,80.14 270 bottom
R108  1K  [0402]  100.71,83.57 180 bottom
R109  470R  [0402]  95.12,67.06 0 bottom
R110  470R  [0402]  95.12,66.04 0 bottom
R111  10R/1%  [0402]  95.12,68.2 180 bottom
R112  100K  [0402]  89.28,58.93 90 bottom
R113  1M  [0402]  109.35,77.85 0 bottom
R114  12K4 / 1%  [0402]  113.16,68.07 270 bottom
R115  10K  [0402]  100.71,81.79 0 bottom
R116  100R  [0402]  118.49,85.6 0 bottom
R117  100R  [0402]  118.49,83.06 0 bottom
R118  1K5  [0402]  114.17,82.17 0 bottom
R119  1K5  [0402]  114.17,83.06 0 bottom
R120  1M  [0402]  111,56.01 180 bottom
RN1  33R  [CAY16]  19.18,29.59 90 bottom
RN2  49R9 1%  [CAY16]  16.26,29.59 270 bottom
RN3  49R9 1%  [CAY16]  16.26,71.5 270 bottom
RN4  33R  [CAY16]  19.18,71.5 90 bottom
RN5  49R9 1%  [CAY16]  54.36,29.59 270 bottom
RN6  33R  [CAY16]  57.28,29.59 90 bottom
RN7  49R9 1%  [CAY16]  54.36,71.5 270 bottom
RN8  33R  [CAY16]  57.28,71.5 90 bottom
RN9  49R9 1%  [CAY16]  92.46,29.59 270 bottom
RN10  33R  [CAY16]  95.38,29.59 90 bottom
RN11  49R9 1%  [CAY16]  92.46,71.5 270 bottom
RN12  33R  [CAY16]  95.38,71.5 90 bottom
U1  HY931147C-RJ45  [HY931147C]  16,28.57 0 top
U2  MICRO USB  [MICRO-USB5+4P-SMD-0.65-B]  13.97,42.67 270 top
U3  HY931147C-RJ45  [HY931147C]  16,70.48 0 top
U4  MICRO USB  [MICRO-USB5+4P-SMD-0.65-B]  13.97,84.58 270 top
U5  HY931147C-RJ45  [HY931147C]  54.1,28.57 0 top
U6  MICRO USB  [MICRO-USB5+4P-SMD-0.65-B]  52.07,42.67 270 top
U7  HY931147C-RJ45  [HY931147C]  54.1,70.48 0 top
U8  MICRO USB  [MICRO-USB5+4P-SMD-0.65-B]  52.07,84.58 270 top
U9  HY931147C-RJ45  [HY931147C]  92.2,28.57 0 top
U10  MICRO USB  [MICRO-USB5+4P-SMD-0.65-B]  90.17,42.67 270 top
U11  HY931147C-RJ45  [HY931147C]  92.2,70.48 0 top
U12  MICRO USB  [MICRO-USB5+4P-SMD-0.65-B]  90.17,84.58 270 top
U$1  AG9800PTH  [AG9800PTH]  36.2,66.04 180 top
U$2  AG9800PTH  [AG9800PTH]  74.3,24.13 180 top
U$3  AG9800PTH  [AG9800PTH]  74.3,66.04 180 top
U$4  AG9800PTH  [AG9800PTH]  112.39,24.13 180 top
U$5  AG9800PTH  [AG9800PTH]  112.39,66.04 180 top
U$7  AG9800PTH  [AG9800PTH]  36.2,24.13 180 top
USBVCC  SOLDERJUMPERNC  [SJ_2S]  16.76,37.34 180 bottom
USBVCC1  SOLDERJUMPERNC  [SJ_2S]  16.76,79.25 180 bottom
USBVCC2  SOLDERJUMPERNC  [SJ_2S]  54.86,37.34 180 bottom
USBVCC3  SOLDERJUMPERNC  [SJ_2S]  54.86,79.25 180 bottom
USBVCC4  SOLDERJUMPERNC  [SJ_2S]  92.96,37.34 180 bottom
USBVCC5  SOLDERJUMPERNC  [SJ_2S]  92.96,79.25 180 bottom
Y1  20MhZ  [X2-SMD-5.0X3.2X1.3MM]  31.62,32.26 270 bottom
Y2  25MhZ  [X2-SMD-5.0X3.2X1.3MM]  36.83,11.94 180 bottom
Y3  25MhZ  [X2-SMD-5.0X3.2X1.3MM]  36.83,53.85 180 bottom
Y4  20MhZ  [X2-SMD-5.0X3.2X1.3MM]  31.62,74.17 270 bottom
Y5  25MhZ  [X2-SMD-5.0X3.2X1.3MM]  74.93,11.94 180 bottom
Y6  20MhZ  [X2-SMD-5.0X3.2X1.3MM]  69.72,32.26 270 bottom
Y7  25MhZ  [X2-SMD-5.0X3.2X1.3MM]  74.93,53.85 180 bottom
Y8  20MhZ  [X2-SMD-5.0X3.2X1.3MM]  69.72,74.17 270 bottom
Y9  25MhZ  [X2-SMD-5.0X3.2X1.3MM]  113.03,11.94 180 bottom
Y10  20MhZ  [X2-SMD-5.0X3.2X1.3MM]  107.82,32.26 270 bottom
Y11  25MhZ  [X2-SMD-5.0X3.2X1.3MM]  113.03,53.85 180 bottom
Y12  20MhZ  [X2-SMD-5.0X3.2X1.3MM]  107.82,74.17 270 bottom
Z1  PGB1010603  [C0402]  16.13,42.55 90 bottom
Z2  PGB1010603  [C0402]  16.13,44.83 90 bottom
Z3  PGB1010603  [C0402]  16.13,84.45 90 bottom
Z4  PGB1010603  [C0402]  16.13,86.74 90 bottom
Z5  PGB1010603  [C0402]  54.23,42.55 90 bottom
Z6  PGB1010603  [C0402]  54.23,44.83 90 bottom
Z7  PGB1010603  [C0402]  54.23,84.45 90 bottom
Z8  PGB1010603  [C0402]  54.23,86.74 90 bottom
Z9  PGB1010603  [C0402]  92.33,42.55 90 bottom
Z10  PGB1010603  [C0402]  92.33,44.83 90 bottom
Z11  PGB1010603  [C0402]  92.33,84.45 90 bottom
Z12  PGB1010603  [C0402]  92.33,86.74 90 bottom

## Library data of the parts
C1 C29 C36 C83 C90 C126 C133 C169 C176 C212 C219 C255 L1-L3 L5-L8 L10-L13 L15-L18 L20-L23 L25-L28 L30 = rcl
C2-C4 C22 C23 C32 C34 C35 C54 C76 C77 C86 C88 C89 C97 C119 C120 C129 C131 C132 C140 C162 C163 C172 C174 C175 C183 C205 C206 C215 C217 C218 C226 C248 C249 C258 FID1-FID36 Z1-Z12 = freetronics
C5 C11 C18 C19 C21 C33 C53 C65 C67 C69 C87 C96 C108 C110 C112 C130 C139 C151 C153 C155 C173 C182 C194 C196 C198 C216 C225 C237 C239 C241 D1-D3 D8 D9 D11 D14 D15 D17 D20 D21 D23 D26 D27 D29 D32 D33 D35 E$1-E$6 FTDI-RESET FTDI-RESET1-FTDI-RESET5 J2 J15 J29 J43 J57 J71 L4 L9 L14 L19 L24 L29 USBVCC USBVCC1-USBVCC5 = SparkFun
C6-C10 C12-C17 C20 C24-C28 C30 C31 C37-C52 C55-C64 C66 C68 C70-C75 C78-C82 C84 C85 C91-C95 C98-C107 C109 C111 C113-C118 C121-C125 C127 C128 C134-C138 C141-C150 C152 C154 C156-C161 C164-C168 C170 C171 C177-C181 C184-C193 C195 C197 C199-C204 C207-C211 C213 C214 C220-C224 C227-C236 C238 C240 C242-C247 C250-C254 C256 C257 IC2 IC9 IC15 IC21 IC27 IC33 R1-R120 U1 U3 U5 U7 U9 U11 = freetronics-jon
D4 D6 D7 D12 D13 D18 D19 D24 D25 D30 D31 D36 = MySMD
D5 D10 D16 D22 D28 D34 IC5 IC6 IC11 IC12 IC17 IC18 IC23 IC24 IC29 IC30 IC35 IC36 J1 J3-J14 J16-J28 J30-J42 J44-J56 J58-J70 J72-J84 JP1-JP6 U$1-U$5 U$7 = SKAARHOJ
F1-F6 = Seeed-OPL-fuse
IC1 IC7 IC13 IC19 IC25 IC31 = ftdichip; MPN: FT232RQ; OC_FARNELL: 1146033; OC_NEWARK: 91K9919
IC3 IC8 IC14 IC20 IC26 IC32 RN1-RN12 = freetronics-master-v1
IC4 IC10 IC16 IC22 IC28 IC34 = template
K1-K6 = Seeed-OPL-Button; MPN: TS-1188E
U2 U4 U6 U8 U10 U12 = Seeed-OPL-Connector; MPN: ST-USB-001G
Y1-Y12 = Seeed-OPL-crystal-osctllator; MPN: X053201602002